# Altium PCB T1_MODIFYV1_0527.PCBDOC (part 2 of 6)
Units mm, origin at the board's own origin, x right, y up, seen from the top; angles counter-clockwise.
Board outline 1320.8 x 844.04 mm, 2 copper layers (Top Layer, Bottom Layer); 219 components, 215 nets, 1393 pads, 492 vias.
Unrouted connection lines stored in the file: 60.
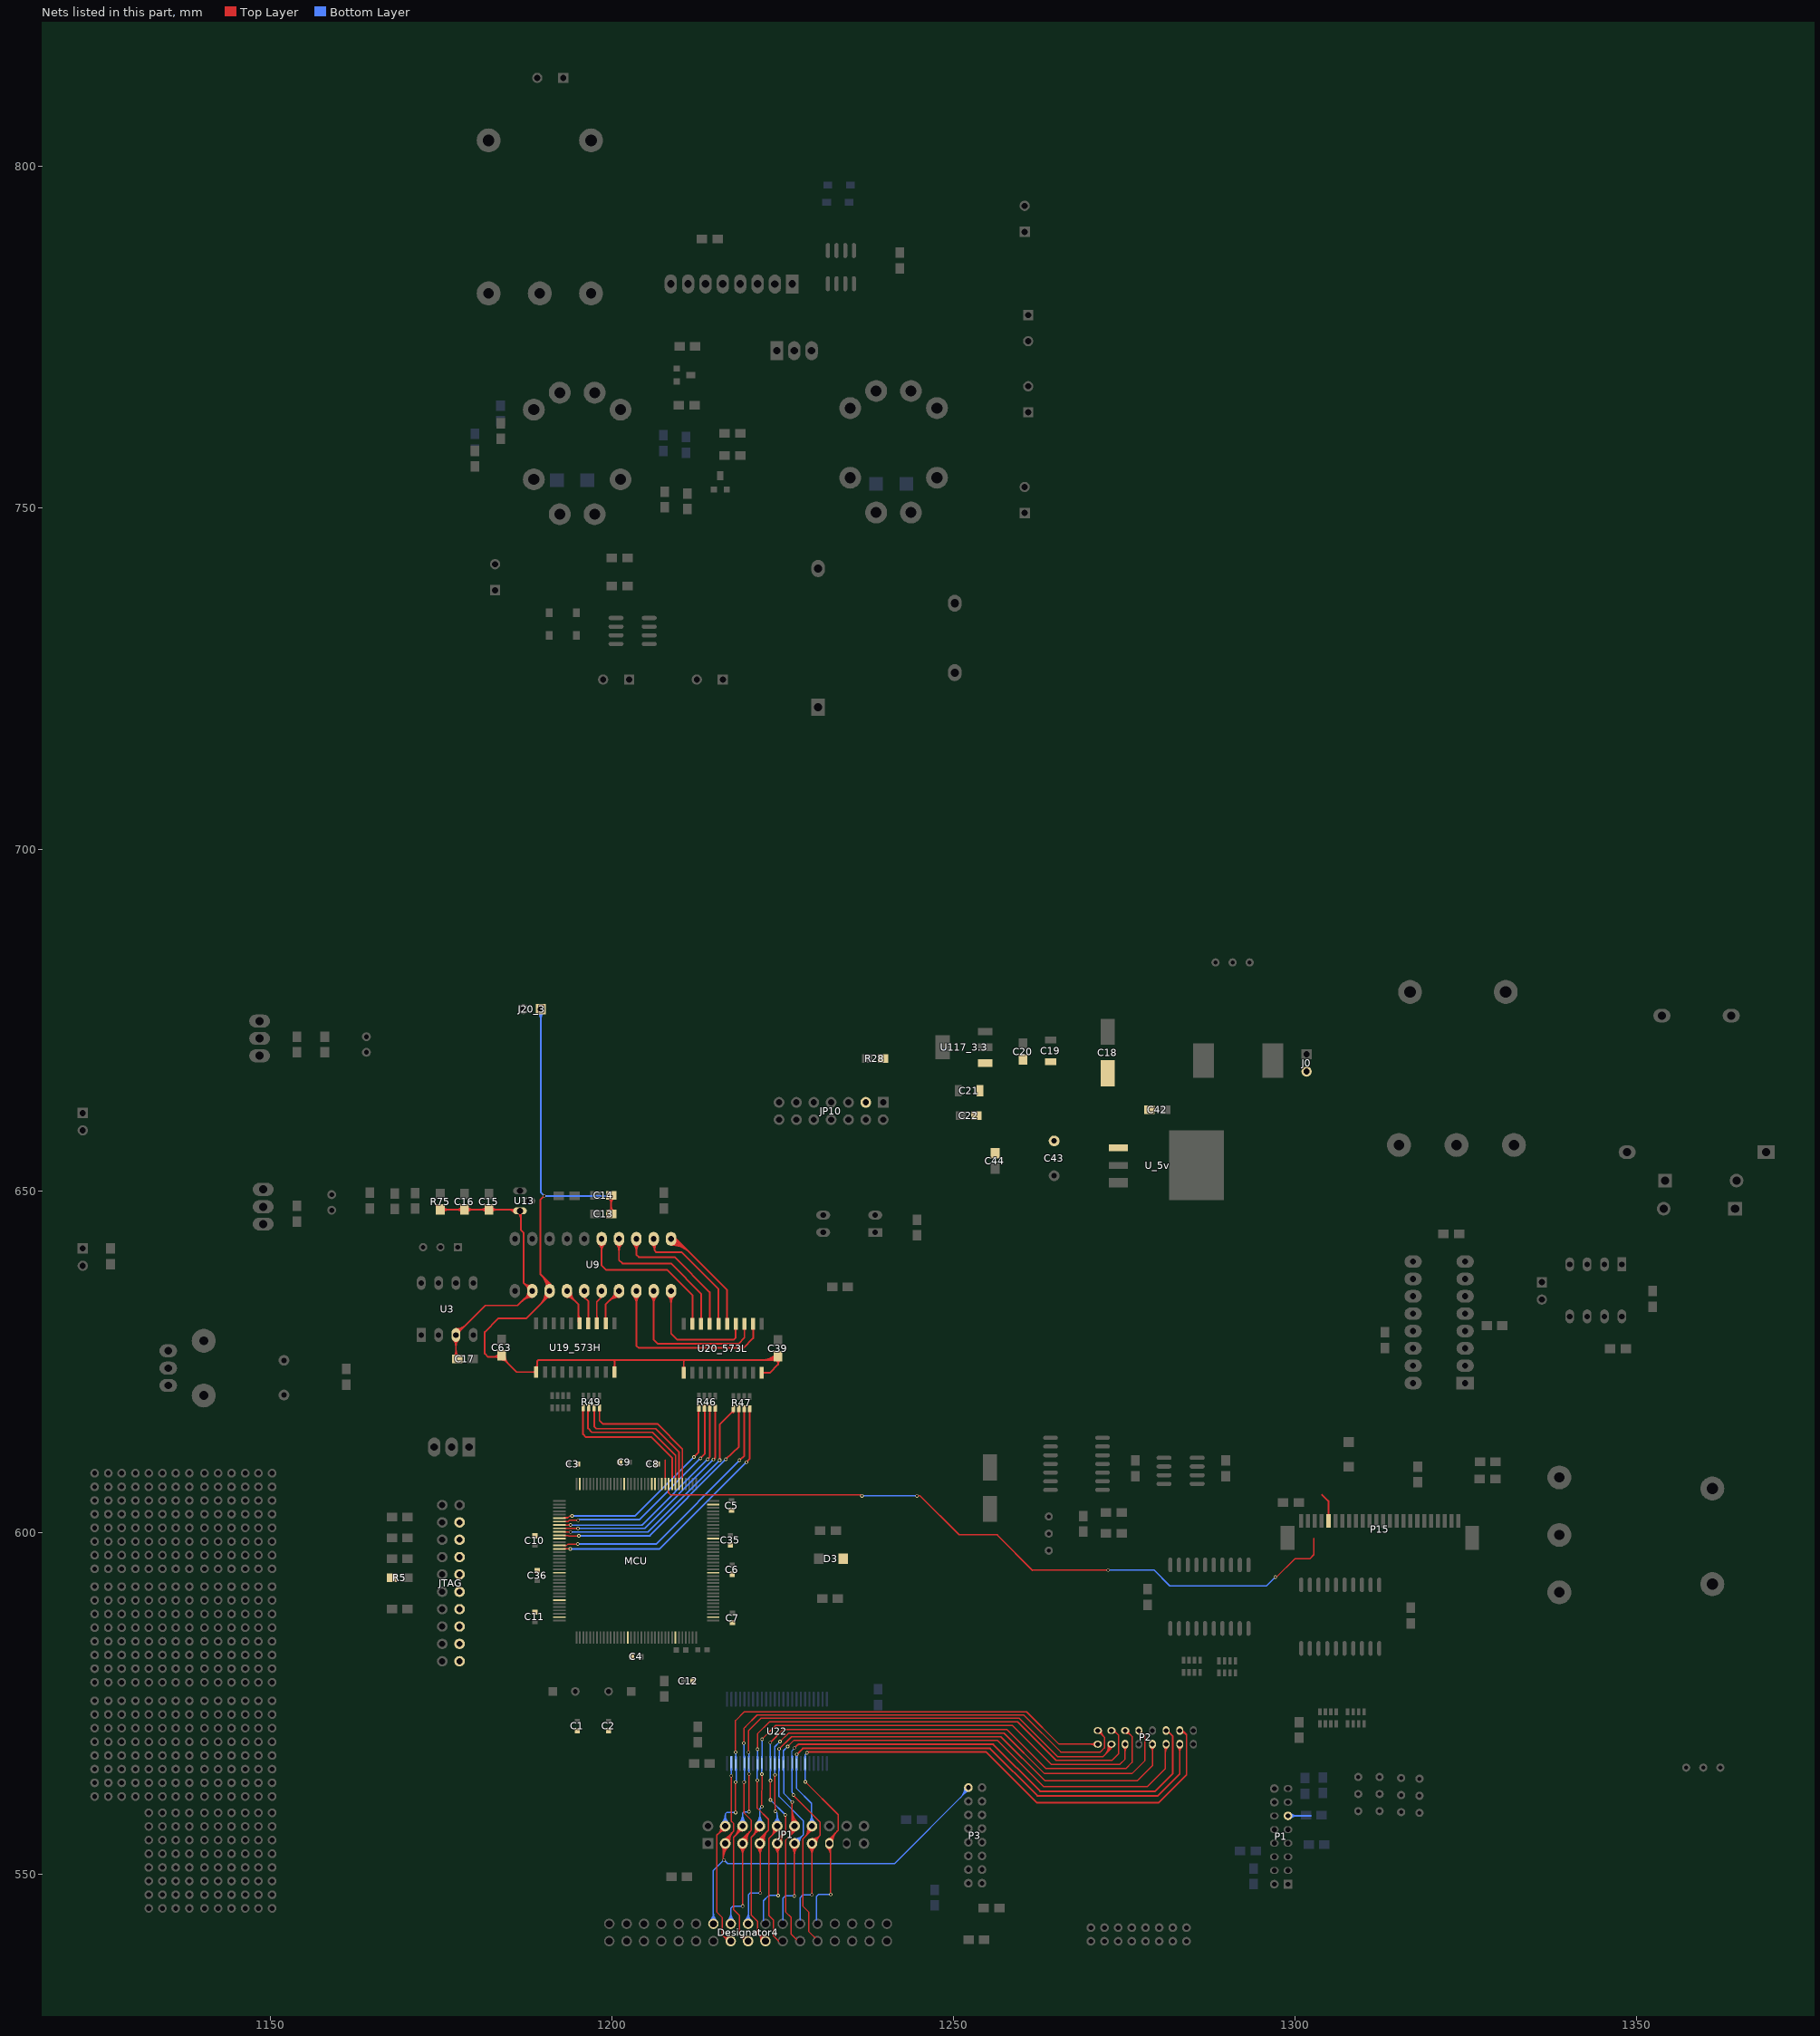
[diagram p2: the nets of this part, all layers, seen from the top]

## Via types
v1: diameter 0.5, hole 0.3, Top Layer to Bottom Layer, 470 vias
v2: diameter 0.8, hole 0.5, Top Layer to Bottom Layer, 12 vias
v3: diameter 3, hole 1.5, Top Layer to Bottom Layer, 4 vias
v4: diameter 3, hole 3, Top Layer to Bottom Layer, 4 vias
v5: diameter 1, hole 0.7, Top Layer to Bottom Layer, 2 vias

## Nets (pads, with @x,y where several pads share a name; then routed paths per layer and width w, separated by ;. In a path a pad name is that pad's centre, name@x,y a point inside that pad or via, vN(x,y) a via of type N, cw(c..) or ccw(c..) an arc to the next point about the centre after c; other vN are vias at no path point) (continued)
AD_D3: JP1.15 P2.19 U22.6 | length 105.7
  Top Layer w0.2: v1(1228.268,563.575) 1233.068,558.775 1233.068,556.489 1231.778,555.198 JP1.15@1231.778,554.552 ; JP1.15@1231.424,554.011 cw(c1230.092,552.678) 1231.976,552.678 ; JP1.15@1231.566,554.152 cw(c1230.574,553.161) 1231.976,553.161 ; JP1.15@1231.678,554.739 cw(c1232.543,554.739) 1231.931,555.352 ; JP1.15@1231.707,554.294 cw(c1231.057,553.644) 1231.976,553.644 ; JP1.15@1231.878,554.739 cw(c1233.226,554.739) 1232.273,555.693 ; v1(1231.976,547.091) JP1.15@1231.976,554.33 ; 1231.976,553.637 cw(c1232.506,553.637) JP1.15@1232.131,554.011 ; JP1.15@1232.078,554.739 cw(c1233.909,554.739) 1232.614,556.034 ; JP1.15@1232.278,554.739 cw(c1234.592,554.739) 1232.956,556.376
  Top Layer w0.254: v1@1228.408,567.703 1228.649,567.944 1254.735,567.944 1262.151,560.527 1280.008,560.527 1284.072,564.591 1284.072,570.484 P2.19@1283.28,571.276 ; P2.19@1283.056,571.076 cw(c1283.188,570.414) 1283.665,570.891 ; P2.19@1283.106,570.826 cw(c1283.299,569.854) 1284.001,570.555
  Bottom Layer w0.2: v1@1228.217,563.626 U22.6@1228.217,565.353 ; U22.6@1228.242,567.08 1228.242,567.563 v1(1228.496,567.817) ; 1229.868,542.569 1229.868,546.76 1230.198,547.091 v1(1231.976,547.091)
AD_D4: JP1.14 P2.20 U22.8 | length 104.9
  Top Layer w0.2: 1228.161,555.467 ccw(c1227.066,556.562) JP1.14@1228.57,556.929 ; 1228.412,555.719 ccw(c1227.47,556.66) JP1.14@1228.764,556.976 ; 1228.664,555.97 ccw(c1227.874,556.759) JP1.14@1228.959,557.024 ; 1228.915,556.221 ccw(c1228.278,556.858) JP1.14@1229.153,557.071 ; 1229,556.306 cw(c1229.238,556.068) JP1.14@1229.238,556.405 ; JP1.14@1229.182,556.87 1229.182,556.489 1227.887,555.193 1227.887,545.389 1228.801,544.474 1228.801,541.639 1230.114,540.326
  Top Layer w0.254: v1(1227.023,567.588) 1227.887,568.452 1255.319,568.452 1262.228,561.543 1279.881,561.543 1283.082,564.745 P2.20@1283.082,569.078 ; P2.20@1282.819,568.679 cw(c1282.182,568.043) 1283.082,568.043 cw(c1283.983,568.043) P2.20@1283.346,568.679
  Bottom Layer w0.2: U22.8@1226.979,565.531 1226.947,562.635 1229.157,560.426 JP1.14@1229.157,556.87 ; JP1.14@1228.752,557.578 ccw(c1227.774,558.556) 1229.157,558.556 ; JP1.14@1228.893,557.437 ccw(c1228.257,558.073) 1229.157,558.073 ; 1229.157,557.96 ccw(c1230.075,557.96) JP1.14@1229.437,557.299 ; 1229.157,558.431 ccw(c1230.53,558.431) JP1.14@1229.576,557.443 ; 1229.157,558.902 ccw(c1230.984,558.902) JP1.14@1229.715,557.587
  Bottom Layer w0.254: U22.8@1226.998,567.055 1226.998,567.563 v1(1227.023,567.588)
AD_D5: JP1.13 P2.21 U22.9 | length 104.4
  Top Layer w0.2: v1@1226.515,561.569 1230.452,557.632 1230.452,555.766 JP1.13@1229.238,554.552 1229.238,547.73 1229.233,547.726 v1(1229.233,547.014) ; JP1.13@1228.752,554.066 cw(c1227.578,552.892) 1229.238,552.892 cw(c1230.897,552.892) JP1.13@1229.724,554.066 ; JP1.13@1228.893,554.207 cw(c1228.061,553.375) 1229.238,553.375 cw(c1230.414,553.375) JP1.13@1229.582,554.207 ; JP1.13@1229.238,555.039 ccw(c1229.238,556.216) 1230.07,555.384 ccw(c1230.902,554.552) JP1.13@1229.725,554.552 ; JP1.13@1229.238,555.239 ccw(c1229.238,556.899) 1230.411,555.725 ccw(c1231.585,554.552) JP1.13@1229.925,554.552
  Top Layer w0.254: v1(1226.642,568.503) 1227.176,569.036 1227.226,569.036 ; 1227.277,569.062 1255.776,569.062 1262.634,562.204 1279.5,562.204 1282.065,564.769 1282.065,570.255 1281.405,570.916 1281.405,571.221 P2.21@1281.074,571.551 ; P2.21@1281.083,570.824 cw(c1281.09,569.844) 1281.783,570.537
  Bottom Layer w0.15: U22.9@1226.312,567.055 1226.312,568.147 v1@1226.769,568.604 ; 1226.312,567.468 ccw(c1226.586,567.468) U22.9@1226.392,567.275
  Bottom Layer w0.2: U22.9@1226.337,565.48 1226.337,562 v1@1226.49,561.848 ; 1227.506,542.798 1227.506,546.608 1227.912,547.014 v1(1229.233,547.014)
  other v1: 1226.515,561.645
AD_D6: JP1.12 P2.22 U22.11 | length 108.8
  Top Layer w0.2: v1(1225.677,568.731) 1226.566,569.62 1256.436,569.62 1263.167,562.889 1278.331,562.889 1280.947,565.506 1280.947,569.112 P2.22@1281.201,569.366 ; 1225.748,555.391 ccw(c1224.783,556.355) JP1.12@1226.056,556.845 ; 1225.965,555.609 ccw(c1225.098,556.476) JP1.12@1226.243,556.917 ; 1226.183,555.826 ccw(c1225.412,556.597) JP1.12@1226.43,556.989 ; JP1.12@1226.215,557.582 ccw(c1225.975,557.825) 1226.317,557.823 ; JP1.12@1226.312,557.098 v1(1226.337,560.629) ; 1226.32,558.237 ccw(c1227.848,558.226) JP1.12@1226.76,557.153 ; 1226.324,558.72 ccw(c1228.335,558.706) JP1.12@1226.902,557.294 ; 1226.327,559.203 ccw(c1228.821,559.185) JP1.12@1227.045,557.434 ; 1226.331,559.686 ccw(c1229.307,559.664) JP1.12@1227.187,557.575 ; 1226.4,556.044 ccw(c1225.726,556.718) JP1.12@1226.616,557.061 ; 1226.618,556.261 ccw(c1226.04,556.839) JP1.12@1226.803,557.132 ; JP1.12@1226.698,557.092 1226.698,556.341 1225.372,555.015 1225.372,544.551 1226.185,543.738 1226.185,541.274 1227.176,540.283 ; P2.22@1280.8,568.66 cw(c1280.443,568.303) 1280.947,568.303 ; 1280.947,567.652 cw(c1282.374,567.652) P2.22@1281.365,568.66 ; 1280.947,568.135 cw(c1281.891,568.135) P2.22@1281.224,568.802
  Bottom Layer w0.2: U22.11@1225.03,565.278 cw(c1224.88,565.127) 1225.093,565.127 ; U22.11@1225.067,566.801 1225.067,568.122 v1(1225.677,568.731) ; U22.11@1225.093,565.531 1225.093,561.924 v1@1226.342,560.633
AD_D7: JP1.11 P2.24 U22.12 | length 100.9
  Top Layer w0.2: v1(1224.432,568.376) 1226.236,570.179 1256.894,570.179 1263.32,563.753 1276.909,563.753 1279.082,565.927 P2.24@1279.082,569.078 ; JP1.11@1226.212,554.066 cw(c1225.172,553.027) 1226.642,553.027 ; JP1.11@1226.353,554.207 cw(c1225.655,553.509) 1226.642,553.509 ; v1@1226.642,546.76 JP1.11@1226.642,554.33 ; 1226.642,552.758 cw(c1228.491,552.758) JP1.11@1227.184,554.066 ; 1226.642,553.241 cw(c1228.009,553.241) JP1.11@1227.042,554.207 ; 1226.642,553.724 cw(c1227.526,553.724) JP1.11@1226.901,554.349 ; P2.24@1278.8,568.66 cw(c1278.117,567.978) 1279.082,567.978 cw(c1280.048,567.978) P2.24@1279.365,568.66
  Bottom Layer w0.2: 1224.407,565.127 cw(c1224.62,565.127) U22.12@1224.469,565.278 ; U22.12@1224.407,565.531 1224.407,561.442 1227.963,557.886 1227.963,555.817 JP1.11@1226.698,554.552 ; U22.12@1224.432,567.004 v1@1224.432,568.477 ; 1224.966,542.798 1224.966,546.506 1225.321,546.862 v1(1226.642,546.862) ; JP1.11@1226.698,555.039 ccw(c1226.698,556.216) 1227.53,555.384 ccw(c1228.362,554.552) JP1.11@1227.185,554.552 ; JP1.11@1226.698,555.239 ccw(c1226.698,556.899) 1227.871,555.725 ccw(c1229.045,554.552) JP1.11@1227.385,554.552
AD_D8: JP1.10 P2.25 U22.13 | length 101.7
  Top Layer w0.2: 1223.246,555.607 ccw(c1222.416,556.437) JP1.10@1223.514,556.85 ; 1223.465,555.826 ccw(c1222.735,556.557) JP1.10@1223.702,556.92 ; 1223.685,556.046 ccw(c1223.054,556.677) JP1.10@1223.889,556.991 ; v1(1223.823,564.591) 1223.823,561.137 v1(1223.848,559.257) ; 1223.904,556.265 ccw(c1223.372,556.797) JP1.10@1224.076,557.061 ; 1223.963,556.324 cw(c1224.158,556.129) JP1.10@1224.158,556.405 ; JP1.10@1224.026,556.87 1224.026,556.387 1222.959,555.32 1222.959,543.966 1223.594,543.331 1223.594,541.02 1224.686,539.928 ; v1(1224.559,569.468) 1225.804,570.713 1257.351,570.713 1263.294,564.769 1276.096,564.769 1277.95,566.623 1277.95,570.306 1277.178,571.078 P2.25@1277.082,571.078 ; P2.25@1277.091,570.778 cw(c1277.126,569.931) 1277.726,570.531 ; P2.25@1277.482,570.978 ccw(c1277.975,570.978) 1277.627,570.63
  Bottom Layer w0.2: JP1.10@1223.672,557.578 ccw(c1222.51,558.74) 1224.153,558.74 ; v1@1223.797,564.617 U22.13@1223.797,565.302 ; U22.13@1223.797,567.08 1223.797,568.706 v1(1224.559,569.468) ; JP1.10@1223.813,557.437 ccw(c1222.993,558.257) 1224.153,558.257 ; v1(1223.848,559.257) 1224.153,558.952 JP1.10@1224.153,556.692 ; 1224.153,558.28 ccw(c1225.346,558.28) JP1.10@1224.502,557.437 ; 1224.153,558.763 ccw(c1225.829,558.763) JP1.10@1224.644,557.578
AD_D9: JP1.9 P2.27 U22.14 | length 102.3
  Top Layer w0.2: v1(1223.137,569.316) 1225.067,571.246 1257.757,571.246 1263.472,565.531 1275.207,565.531 1276.096,566.42 1276.096,570.205 P2.27@1275.222,571.078 ; v1@1223.162,560.984 v1(1223.162,563.753) ; JP1.9@1223.672,554.066 cw(c1222.203,552.597) 1224.28,552.597 ; JP1.9@1223.813,554.207 cw(c1222.686,553.08) 1224.28,553.08 ; JP1.9@1223.955,554.349 cw(c1223.169,553.563) 1224.28,553.563 ; JP1.9@1224.158,555.239 ccw(c1224.158,555.523) 1224.359,555.323 ; JP1.9@1224.215,554.609 1224.215,555.179 1225.372,556.336 ; JP1.9@1224.244,554.566 cw(c1225.314,554.744) 1224.547,555.511 ; v1(1224.28,546.938) JP1.9@1224.28,554.33 ; 1224.28,553.188 cw(c1225.522,553.188) JP1.9@1224.644,554.066 ; 1224.28,553.67 cw(c1225.039,553.67) JP1.9@1224.502,554.207 ; JP1.9@1224.441,554.599 cw(c1225.786,554.822) 1224.822,555.786 ; JP1.9@1224.639,554.632 cw(c1226.258,554.901) 1225.097,556.061 ; JP1.9@1224.836,554.665 cw(c1226.729,554.979) 1225.372,556.336 ; v1@1225.372,558.724 1225.372,556.336 ; P2.27@1275.182,570.678 cw(c1275.182,569.616) 1275.934,570.367 ; P2.27@1275.182,570.878 cw(c1275.182,570.299) 1275.592,570.709 ; P2.27@1275.582,571.078 ccw(c1276.451,571.078) 1275.837,570.464
  Bottom Layer w0.2: 1222.146,542.849 1222.146,546.176 1222.908,546.938 v1(1224.28,546.938) ; v1(1223.162,560.934) 1225.321,558.775 v1(1225.321,558.724) ; v1(1223.162,563.753) U22.14@1223.162,565.379 ; U22.14@1223.162,567.106 v1@1223.162,569.366
AD_D10: Designator4.d10 JP1.8 P2.28 U22.16 | length 102.7
  Top Layer w0.2: 1220.528,555.632 ccw(c1219.468,556.692) JP1.8@1220.942,556.966 ; 1220.797,555.901 ccw(c1219.921,556.777) JP1.8@1221.139,557.003 ; 1221.065,556.17 ccw(c1220.374,556.861) JP1.8@1221.335,557.039 ; 1221.076,556.18 cw(c1221.618,555.638) JP1.8@1221.618,556.405 ; JP1.8@1221.486,556.844 1221.486,556.59 1220.343,555.447 1220.343,544.093 1221.283,543.154 1221.283,541.401 Designator4.d10@1222.426,540.258 ; Designator4.d10@1221.764,540.258 ccw(c1220.166,540.258) 1221.296,541.388 ccw(c1222.426,542.518) Designator4.d10@1222.426,540.92 ; v1@1221.892,560.001 v1(1221.918,564.693) ; v1@1221.918,569.824 1223.924,571.83 1258.57,571.83 1264.285,566.115 1274.293,566.115 1275.082,566.905 P2.28@1275.082,569.078 ; Designator4.d10@1221.964,540.258 ccw(c1220.848,540.258) 1221.637,541.047 ccw(c1222.426,541.835) Designator4.d10@1222.426,540.72 ; P2.28@1274.8,568.66 cw(c1274.117,567.978) 1275.082,567.978 cw(c1276.048,567.978) P2.28@1275.365,568.66
  Bottom Layer w0.2: JP1.8@1221.132,557.578 ccw(c1219.958,558.752) 1221.618,558.752 ccw(c1223.277,558.752) JP1.8@1222.104,557.578 ; JP1.8@1221.273,557.437 ccw(c1220.441,558.269) 1221.618,558.269 ccw(c1222.794,558.269) JP1.8@1221.962,557.437 ; JP1.8@1221.618,557.092 1221.618,559.668 v1(1221.918,559.968) ; v1@1221.867,564.876 ccw(c1222.101,564.876) v1@1221.935,564.71 ; 1221.867,565.127 cw(c1222.08,565.127) U22.16@1221.929,565.278 ; U22.16@1221.867,565.429 1221.867,564.744 v1(1221.918,564.693) ; U22.16@1221.918,567.106 1221.918,569.773 v1(1221.943,569.798)
AD_D11: Designator4.d11 JP1.7 P2.29 U22.17 | length 107.3
  Top Layer w0.2: JP1.7@1221.132,554.066 cw(c1219.847,552.781) 1221.664,552.781 ; v1(1221.232,563.804) 1221.232,559.714 1222.858,558.089 1222.858,556.514 ; v1@1221.257,568.376 1221.257,570.586 1223.035,572.364 1259.332,572.364 1264.971,566.725 1273.175,566.725 1274.14,567.69 1274.14,570.408 P2.29@1273.302,571.246 ; JP1.7@1221.273,554.207 cw(c1220.33,553.264) 1221.664,553.264 ; JP1.7@1221.415,554.349 cw(c1220.813,553.747) 1221.664,553.747 ; JP1.7@1221.507,554.531 cw(c1222.511,554.722) 1221.789,555.445 ; JP1.7@1221.618,554.552 1221.618,555.274 1222.858,556.514 ; v1(1221.664,547.294) JP1.7@1221.664,554.253 ; 1221.664,553.004 cw(c1223.166,553.004) JP1.7@1222.104,554.066 ; 1221.664,553.486 cw(c1222.683,553.486) JP1.7@1221.962,554.207 ; JP1.7@1221.704,554.568 cw(c1222.96,554.808) 1222.056,555.712 ; JP1.7@1221.9,554.606 cw(c1223.41,554.893) 1222.323,555.979 ; JP1.7@1222.097,554.643 cw(c1223.859,554.978) 1222.59,556.247 ; JP1.7@1222.293,554.681 cw(c1224.308,555.064) 1222.858,556.514 ; P2.29@1273.193,570.878 cw(c1273.246,569.862) 1273.966,570.582 ; P2.29@1273.582,571.078 ccw(c1273.854,571.078) 1273.662,570.886
  Bottom Layer w0.2: Designator4.d11@1219.418,543.266 ccw(c1218.165,544.519) 1219.937,544.519 ; Designator4.d11@1219.559,543.125 ccw(c1218.648,544.036) 1219.937,544.036 ; Designator4.d11@1219.937,542.569 1219.937,547.065 1220.165,547.294 v1(1221.664,547.294) ; 1219.937,543.791 ccw(c1220.879,543.791) Designator4.d11@1220.212,543.125 ; 1219.937,544.274 ccw(c1221.361,544.274) Designator4.d11@1220.354,543.266 ; v1(1221.232,563.804) U22.17@1221.232,565.379 ; 1221.232,565.127 cw(c1221.445,565.127) U22.17@1221.294,565.278 ; U22.17@1221.257,566.928 1221.257,568.325 v1(1221.283,568.35)
AD_D12: Designator4.d12 JP1.6 P2.30 U22.19 | length 105.8
  Top Layer w0.2: 1217.912,555.607 ccw(c1216.715,556.804) JP1.6@1218.395,557.009 ; 1218.202,555.897 ccw(c1217.232,556.867) JP1.6@1218.594,557.033 ; 1218.449,556.144 cw(c1219.078,555.516) JP1.6@1219.078,556.405 ; 1218.493,556.188 ccw(c1217.75,556.93) JP1.6@1218.792,557.057 ; 1218.743,541.147 ccw(c1219.44,541.844) Designator4.d12@1219.706,540.895 ; 1218.935,540.954 cw(c1218.239,540.258) Designator4.d12@1219.224,540.258 ; 1218.984,540.906 ccw(c1219.546,541.467) Designator4.d12@1219.761,540.703 ; JP1.6@1219.078,557.092 1219.078,556.773 1217.752,555.447 1217.752,544.855 1218.616,543.992 1218.616,541.274 1219.632,540.258 Designator4.d12@1219.886,540.258 ; 1219.226,540.664 ccw(c1219.652,541.09) Designator4.d12@1219.815,540.51 ; v1(1219.962,567.919) 1219.962,571.068 1221.791,572.897 1259.561,572.897 1265.199,567.258 1271.829,567.258 1273.082,568.512 P2.30@1273.082,569.078 ; v1(1220.013,559.181) v1(1220.013,564.718) ; 1272.162,567.591 ccw(c1271.057,568.697) P2.30@1272.59,569 ; 1272.427,567.856 ccw(c1271.499,568.784) P2.30@1272.786,569.039 ; 1272.692,568.121 ccw(c1271.941,568.872) P2.30@1272.982,569.078 ; 1272.956,568.386 ccw(c1272.383,568.959) P2.30@1273.179,569.117
  Bottom Layer w0.2: JP1.6@1218.592,557.578 ccw(c1217.418,558.752) 1219.078,558.752 ccw(c1220.737,558.752) JP1.6@1219.564,557.578 ; JP1.6@1218.733,557.437 ccw(c1217.901,558.269) 1219.078,558.269 ccw(c1220.254,558.269) JP1.6@1219.422,557.437 ; JP1.6@1219.078,557.092 1219.078,558.983 1219.276,559.181 v1(1220.013,559.181) ; U22.19@1219.95,565.278 cw(c1219.8,565.127) 1220.013,565.127 ; U22.19@1219.987,567.157 v1@1219.987,567.919 ; v1(1220.013,564.718) U22.19@1220.013,565.404
AD_D13: Designator4.d13 JP1.5 P2.31 U22.20 | length 107.2
  Top Layer w0.2: JP1.5@1218.592,554.066 cw(c1217.418,552.892) 1219.078,552.892 cw(c1220.737,552.892) JP1.5@1219.564,554.066 ; JP1.5@1218.733,554.207 cw(c1217.901,553.375) 1219.078,553.375 cw(c1220.254,553.375) JP1.5@1219.422,554.207 ; JP1.5@1218.967,554.534 cw(c1219.99,554.696) 1219.257,555.428 ; v1(1219.078,545.384) 1219.078,555.249 1220.368,556.539 ; JP1.5@1219.164,554.566 cw(c1220.47,554.772) 1219.535,555.706 ; v1(1219.264,569.256) 1219.264,571.386 1219.519,571.642 ; v1(1219.302,563.55) 1219.302,559.003 1220.368,557.936 1220.368,556.539 ; JP1.5@1219.362,554.597 cw(c1220.949,554.847) 1219.813,555.984 ; 1219.519,571.667 1221.207,573.354 1260.246,573.354 1265.657,567.944 1271.473,567.944 1272.057,568.528 1272.057,570.103 P2.31@1271.082,571.078 ; JP1.5@1219.559,554.628 cw(c1221.429,554.923) 1220.091,556.262 ; JP1.5@1219.757,554.659 cw(c1221.909,554.999) 1220.368,556.539 ; P2.31@1271.182,570.678 cw(c1271.182,569.954) 1271.695,570.466 ; P2.31@1271.382,571.078 ccw(c1272.107,571.078) 1271.595,570.566 ; P2.31@1271.582,571.078 ccw(c1272.789,571.078) 1271.936,570.225
  Bottom Layer w0.2: Designator4.d13@1216.878,543.266 ccw(c1215.748,544.396) 1217.346,544.396 ccw(c1218.944,544.396) Designator4.d13@1217.814,543.266 ; Designator4.d13@1217.019,543.125 ccw(c1216.23,543.913) 1217.346,543.913 ccw(c1218.461,543.913) Designator4.d13@1217.672,543.125 ; Designator4.d13@1217.346,542.798 1217.346,545.033 1217.697,545.384 v1(1219.078,545.384) ; v1(1219.264,569.256) 1219.302,567.919 U22.20@1219.302,567.106 ; 1219.302,567.469 ccw(c1219.602,567.469) U22.20@1219.389,567.257 ; v1@1219.352,563.55 U22.20@1219.352,565.531
AD_D14: Designator4.d14 JP1.4 P2.32 U22.22 | length 102.3
  Top Layer w0.2: 1215.537,555.95 ccw(c1214.714,556.773) JP1.4@1215.861,556.974 ; 1215.606,556.019 cw(c1216.538,555.086) JP1.4@1216.538,556.405 ; 1215.809,556.222 ccw(c1215.177,556.854) JP1.4@1216.058,557.008 ; 1215.947,556.36 cw(c1216.538,555.769) JP1.4@1216.538,556.605 ; 1216.254,540.995 ccw(c1216.756,541.497) Designator4.d14@1217.061,540.856 ; 1216.454,540.794 ccw(c1216.885,541.225) Designator4.d14@1217.147,540.675 ; 1216.467,540.781 cw(c1215.944,540.258) Designator4.d14@1216.684,540.258 ; JP1.4@1216.538,557.092 1216.538,556.951 1215.466,555.879 1215.39,555.879 1215.339,555.828 1215.339,544.474 1216.076,543.738 1216.076,541.172 Designator4.d14@1217.295,539.953 ; 1216.654,540.594 ccw(c1217.014,540.954) Designator4.d14@1217.233,540.495 ; v1(1218.057,559.079) v1(1218.057,563.55) ; v1(1218.057,567.919) 1218.057,572.541 1219.327,573.811 1260.678,573.811 1265.399,569.091 ; 1265.386,569.078 P2.32@1271.082,569.078 ; P2.32@1270.7,568.795 ccw(c1270.017,568.113) 1270.017,569.078 ccw(c1270.017,570.044) P2.32@1270.7,569.361
  Bottom Layer w0.2: JP1.4@1216.052,557.578 ccw(c1214.878,558.752) 1216.538,558.752 ccw(c1218.197,558.752) JP1.4@1217.024,557.578 ; JP1.4@1216.193,557.437 ccw(c1215.361,558.269) 1216.538,558.269 ccw(c1217.714,558.269) JP1.4@1216.882,557.437 ; JP1.4@1216.538,557.092 1216.538,558.881 1216.736,559.079 v1(1218.057,559.079) ; v1@1218.039,567.901 cw(c1217.874,567.736) v1@1218.108,567.736 ; U22.22@1218.045,567.257 ccw(c1217.895,567.408) 1218.108,567.408 ; v1(1218.057,563.55) 1218.159,563.651 U22.22@1218.159,565.48 ; v1(1218.057,567.919) 1218.108,567.868 U22.22@1218.108,566.928
AD_D15: Designator4.d15 JP1.3 P3.33 U22.23 | length 86.1
  Top Layer w0.2: JP1.3@1216.052,554.066 cw(c1215.626,553.64) 1216.228,553.64 ; v1@1216.228,552.277 cw(c1218.636,552.277) JP1.3@1217.004,554.047 ; 1216.228,552.573 ccw(c1216.809,552.573) v1@1216.398,552.163 ; 1216.228,552.733 cw(c1218.215,552.733) JP1.3@1216.868,554.194 ; 1216.228,553.189 cw(c1217.794,553.189) JP1.3@1216.733,554.341 ; 1216.228,553.646 cw(c1217.373,553.646) JP1.3@1216.597,554.488 ; JP1.3@1216.228,554.838 1216.228,552.298 v1(1216.381,552.145) ; JP1.3@1216.24,554.85 1217.778,556.387 ; JP1.3@1216.624,554.566 cw(c1217.755,554.745) 1216.945,555.555 ; JP1.3@1216.822,554.597 cw(c1218.234,554.821) 1217.223,555.832 ; JP1.3@1217.019,554.628 cw(c1218.712,554.897) 1217.5,556.109 ; JP1.3@1217.217,554.66 cw(c1219.191,554.973) 1217.778,556.387 ; v1(1217.422,564.464) 1217.422,557.814 1217.778,557.458 1217.778,556.387
  Bottom Layer w0.2: Designator4.d15@1214.338,543.266 ccw(c1213.208,544.396) 1214.806,544.396 ccw(c1216.404,544.396) Designator4.d15@1215.274,543.266 ; Designator4.d15@1214.479,543.125 ccw(c1213.69,543.913) 1214.806,543.913 ccw(c1215.921,543.913) Designator4.d15@1215.132,543.125 ; Designator4.d15@1214.806,542.798 1214.806,550.596 1216.342,552.132 1216.368,552.132 1216.889,551.612 1241.323,551.612 1251.89,562.178 P3.33@1251.89,562.889 ; v1(1217.422,564.464) 1217.447,564.49 U22.23@1217.447,565.556 ; 1251.005,561.293 ccw(c1249.569,562.729) P3.33@1251.599,562.729 ; 1251.346,561.635 ccw(c1250.252,562.729) P3.33@1251.799,562.729 ; 1251.688,561.976 ccw(c1250.935,562.729) P3.33@1251.999,562.729 ; 1251.743,562.032 cw(c1252.134,561.641) P3.33@1252.134,562.194
ADDR4_1: P15.5 | length 4.1
  Top Layer w0.254: 1303.909,605.612 1304.849,604.672 P15.5@1304.849,601.904
ADRST: P1.11 | length 5.3
  Bottom Layer w0.254: P1.11@1298.931,558.589 1302.258,558.589 ; P1.11@1299.29,558.23 cw(c1300.157,557.363) 1300.157,558.589 cw(c1300.157,559.816) P1.11@1299.29,558.948
AGND: C15.2 C16.2 C17.1 R75.2 U3.3 U9.2 U13.3 | length 69.5
  Top Layer w0.254: R75.2@1174.826,647.344 1186.285,647.344 U13.3@1186.485,647.144 ; R75.2@1175.185,646.985 cw(c1176.053,646.118) 1176.053,647.344 cw(c1176.053,648.571) R75.2@1175.185,647.704 ; U3.3@1176.753,628.24 cw(c1175.886,627.373) 1177.112,627.373 cw(c1178.339,627.373) U3.3@1177.471,628.24 ; C17.1@1176.804,625.809 ccw(c1176.059,626.553) 1177.112,626.553 ; 1177.112,626.185 ccw(c1177.899,626.185) C17.1@1177.343,625.629 ; 1177.112,626.799 ccw(c1178.512,626.799) C17.1@1177.522,625.809 ; U3.3@1177.112,629.361 ccw(c1177.112,630.281) 1177.763,629.631 ; U3.3@1177.112,629.615 ccw(c1177.112,631.148) 1178.196,630.064 ; U3.3@1177.112,629.869 ccw(c1177.112,632.015) 1178.63,630.498 ; C17.1@1177.29,625.45 1177.112,625.627 U3.3@1177.112,628.98 1181.43,633.298 1186.155,633.298 U9.2@1188.288,635.432 ; U3.3@1177.62,629.361 cw(c1177.927,629.361) 1177.71,629.578 ; C16.2@1178.023,646.985 ccw(c1177.156,646.118) 1177.156,647.344 ccw(c1177.156,648.571) C16.2@1178.023,647.704 ; C16.2@1178.741,646.985 cw(c1179.609,646.118) 1179.609,647.344 cw(c1179.609,648.571) C16.2@1178.741,647.704 ; C15.2@1181.579,646.985 ccw(c1180.712,646.118) 1180.712,647.344 ccw(c1180.712,648.571) C15.2@1181.579,647.704 ; C15.2@1182.297,646.985 cw(c1183.165,646.118) 1183.165,647.344 cw(c1183.165,648.571) C15.2@1182.297,647.704 ; 1184.601,647.344 cw(c1184.601,645.761) U13.3@1185.721,646.881 ; 1185.215,647.344 cw(c1185.215,646.374) U13.3@1185.901,647.06 ; U13.3@1186.221,646.881 cw(c1185.278,645.937) 1186.612,645.937 ; U13.3@1186.401,647.06 cw(c1185.891,646.55) 1186.612,646.55 cw(c1187.079,646.551) U13.3@1186.749,646.881 ; U13.3@1186.612,646.963 1186.612,644.373 1187.018,643.966 1187.018,636.626 U9.2@1188.415,635.229 ; 1186.771,633.914 cw(c1188.288,632.397) U9.2@1188.288,634.543 ; 1187.183,636.46 ccw(c1187.76,637.038) U9.2@1188.057,636.277 ; 1187.204,634.348 cw(c1188.288,633.264) U9.2@1188.288,634.797 ; 1187.384,634.527 ccw(c1186.733,635.178) U9.2@1187.653,635.178 ; 1187.438,636.206 cw(c1186.917,635.686) U9.2@1187.653,635.686 ; 1187.458,636.186 ccw(c1187.915,636.642) U9.2@1188.15,636.041
D0: MCU.114 R46.1 | length 30.4
  Top Layer w0.2: MCU.114@1192.886,602.234 1193.521,602.234 1193.775,602.488 v1(1194.13,602.488)
  Top Layer w0.254: v1(1211.961,611.124) 1212.647,611.81 R46.1@1212.647,618.134 ; 1212.647,617.653 cw(c1213.03,617.653) R46.1@1212.759,617.924
  Bottom Layer w0.254: v1(1194.13,602.488) 1203.325,602.488 v1(1211.961,611.124)
D1: MCU.115 R46.2 | length 31.4
  Top Layer w0.2: MCU.115@1192.911,601.65 1192.916,601.655 1193.5,601.655 1193.724,601.878 v1(1195.019,601.878)
  Top Layer w0.254: v1(1212.913,610.933) 1213.536,611.556 R46.2@1213.536,618.058 ; R46.2@1213.385,617.924 cw(c1213.022,617.561) 1213.536,617.561
  Bottom Layer w0.254: v1@1195.121,601.98 1203.858,601.98 ; 1203.947,601.967 v1(1212.913,610.933)
D2: MCU.116 R46.3 | length 33
  Top Layer w0.2: MCU.116@1193.063,601.142 1193.546,601.142 1193.571,601.167
  Top Layer w0.254: 1193.571,601.167 v1(1193.876,601.167) ; v1(1213.968,610.794) 1214.272,611.098 R46.3@1214.272,618.261 ; R46.3@1214.185,617.924 cw(c1213.975,617.714) 1214.272,617.714 cw(c1214.569,617.714) R46.3@1214.359,617.924
  Bottom Layer w0.2: v1(1193.876,601.167) 1204.341,601.167
  Bottom Layer w0.254: 1204.341,601.167 v1(1213.968,610.794)
D3: MCU.117 R46.4 | length 34.1
  Top Layer w0.2: MCU.117@1192.962,600.659 v1@1195.019,600.659
  Top Layer w0.254: v1(1214.806,610.743) 1215.072,611.009 R46.4@1215.072,618.261 ; R46.4@1214.985,617.924 cw(c1214.775,617.714) 1215.072,617.714 cw(c1215.369,617.714) R46.4@1215.159,617.924
  Bottom Layer w0.2: v1(1194.994,600.674) 1204.736,600.674
  Bottom Layer w0.254: 1204.736,600.674 v1(1214.806,610.743)
D4: MCU.118 R47.1 | length 36
  Top Layer w0.2: MCU.118@1192.886,600.177 v1@1193.876,600.177
  Top Layer w0.254: v1(1215.72,610.641) 1215.72,615.848 1217.727,617.855 R47.1@1217.727,618.185 ; R47.1@1217.64,617.848 cw(c1217.43,617.638) 1217.727,617.638 cw(c1218.024,617.638) R47.1@1217.814,617.848
  Bottom Layer w0.2: v1(1193.902,600.151) 1205.255,600.177
  Bottom Layer w0.254: 1205.255,600.177 v1(1215.72,610.641)
D5: MCU.119 R47.2 | length 37.1
  Top Layer w0.2: MCU.119@1192.886,599.643 1193.519,599.643 1193.593,599.569 v1(1195.099,599.569)
  Top Layer w0.254: v1(1216.635,610.794) 1218.527,612.61 R47.2@1218.527,618.185 ; R47.2@1218.44,617.848 cw(c1218.23,617.638) 1218.527,617.638 cw(c1218.824,617.638) R47.2@1218.614,617.848
  Bottom Layer w0.254: v1(1195.099,599.569) 1205.522,599.605 v1(1216.635,610.794)
D6: MCU.122 R47.3 | length 39.3
  Top Layer w0.2: MCU.122@1192.809,598.17 1193.317,598.17 1193.521,598.373 v1(1194.943,598.373)
  Top Layer w0.254: v1(1218.62,610.652) 1219.327,611.276 R47.3@1219.327,618.185 ; R47.3@1219.24,617.848 cw(c1219.03,617.638) 1219.327,617.638 cw(c1219.624,617.638) R47.3@1219.414,617.848
  Bottom Layer w0.254: v1(1194.943,598.373) 1206.461,598.412 v1(1218.62,610.652)
D7: MCU.123 R47.4 | length 40.5
  Top Layer w0.2: MCU.123@1192.86,597.662 v1(1193.851,597.662)
  Top Layer w0.254: v1(1219.636,610.366) 1220.127,610.857 R47.4@1220.127,618.185 ; R47.4@1220.04,617.848 cw(c1219.83,617.638) 1220.127,617.638 cw(c1220.424,617.638) R47.4@1220.214,617.848
  Bottom Layer w0.254: v1(1193.851,597.662) 1206.932,597.662 v1(1219.636,610.366)
D8: MCU.77 R49.4 | length 21.3
  Top Layer w0.254: R49.4@1198.043,617.95 cw(c1197.833,617.74) 1198.13,617.74 cw(c1198.427,617.74) R49.4@1198.217,617.95 ; R49.4@1198.13,618.287 1198.13,616.471 1198.626,615.975 1206.602,615.975 1210.265,612.312 MCU.77@1210.265,607.174
D9: MCU.78 R49.3 | length 20.6
  Top Layer w0.254: R49.3@1197.243,617.95 cw(c1196.972,617.678) 1197.356,617.678 ; R49.3@1197.356,618.007 1197.356,615.569 1197.661,615.264 1206.322,615.264 1209.781,611.806 1209.781,608.314 1209.751,608.284 MCU.78@1209.751,607.949
D10: MCU.79 R49.2 | length 21.9
  Top Layer w0.254: 1196.442,617.525 cw(c1197.042,617.525) R49.2@1196.617,617.95 ; R49.2@1196.442,618.058 1196.442,615.315 1197.026,614.731 1205.89,614.731 1209.269,611.353 1209.269,608.459 1209.273,608.455 1209.273,607.639 1209.265,607.631 MCU.79@1209.265,607.174
D11: MCU.80 R49.1 | length 22.1
  Top Layer w0.254: R49.1@1195.643,617.95 cw(c1195.433,617.74) 1195.73,617.74 cw(c1196.027,617.74) R49.1@1195.817,617.95 ; R49.1@1195.73,618.287 1195.73,614.451 1196.162,614.02 1205.738,614.02 1208.761,610.997 MCU.80@1208.761,607.695
D12: MCU.81 | length 105
  Top Layer w0.2: MCU.81@1208.202,606.501 1208.202,605.92 1208.509,605.612 1236.37,605.612 v1(1236.548,605.434) ; v1(1244.625,605.434) 1245.083,605.434 1250.772,599.745 1256.436,599.745 ; 1256.386,599.669 1261.542,594.512 ; 1261.593,594.589 v1(1272.616,594.589) ; v1(1297.076,593.547) 1297.254,593.547 1299.921,596.214 1302.106,596.214 1302.715,596.824 1302.715,599.186
  Bottom Layer w0.2: v1(1236.548,605.434) v1(1244.625,605.434) ; v1(1272.616,594.589) 1279.296,594.589 1281.633,592.252 1295.781,592.252 v1(1297.076,593.547)
D13: MCU.82 | length 2.8
  Top Layer w0.2: MCU.82@1207.77,607.924 1207.77,610.692
D14: MCU.85
D15: MCU.86
DB0: U9.15 U20_573L.19 | length 27.7
  Top Layer w0.254: U9.15@1197.999,642.349 cw(c1196.915,641.265) 1198.448,641.265 cw(c1199.981,641.265) U9.15@1198.897,642.349 ; U9.15@1198.179,642.528 cw(c1197.528,641.878) 1198.448,641.878 cw(c1199.368,641.878) U9.15@1198.718,642.528 ; U9.15@1198.448,643.052 1198.448,639.166 1199.083,638.531 1207.999,638.531 1211.732,634.797 U20_573L.19@1211.732,630.599 ; U20_573L.19@1211.61,631.272 ccw(c1211.315,631.567) 1211.732,631.567 ccw(c1212.15,631.567) U20_573L.19@1211.855,631.272
DB1: U9.14 U20_573L.18 | length 26.1
  Top Layer w0.254: U9.14@1200.539,642.349 cw(c1199.455,641.265) 1200.988,641.265 cw(c1202.521,641.265) U9.14@1201.437,642.349 ; U9.14@1200.719,642.528 cw(c1200.068,641.878) 1200.988,641.878 cw(c1201.908,641.878) U9.14@1201.258,642.528 ; U9.14@1200.988,643.052 1200.988,639.953 1201.496,639.445 1208.583,639.445 1213.002,635.025 U20_573L.18@1213.002,630.599 ; U20_573L.18@1212.88,631.272 ccw(c1212.585,631.567) 1213.002,631.567 ccw(c1213.42,631.567) U20_573L.18@1213.125,631.272
DB2: U9.13 U20_573L.17 | length 24.5
  Top Layer w0.254: U9.13@1203.079,642.349 cw(c1201.995,641.265) 1203.528,641.265 cw(c1205.061,641.265) U9.13@1203.977,642.349 ; U9.13@1203.259,642.528 cw(c1202.608,641.878) 1203.528,641.878 cw(c1204.448,641.878) U9.13@1203.798,642.528 ; U9.13@1203.528,643.052 1203.528,640.74 1203.884,640.385 1209.142,640.385 1214.272,635.254 U20_573L.17@1214.272,630.599 ; U20_573L.17@1214.15,631.272 ccw(c1213.855,631.567) 1214.272,631.567 ccw(c1214.69,631.567) U20_573L.17@1214.395,631.272
DB3: U9.12 U20_573L.16 | length 22
  Top Layer w0.254: U9.12@1205.706,642.276 cw(c1205.021,641.292) 1206.221,641.292 ; U9.12@1205.851,642.485 cw(c1205.359,641.777) 1206.221,641.777 ; U9.12@1206.068,643.052 1206.221,642.899 1206.221,641.299 1206.398,641.121 1210.107,641.121 1215.542,635.686 U20_573L.16@1215.542,630.599 ; 1206.221,641.633 cw(c1207.233,641.633) U9.12@1206.517,642.349 ; U20_573L.16@1215.42,631.272 ccw(c1215.125,631.567) 1215.542,631.567 ccw(c1215.96,631.567) U20_573L.16@1215.665,631.272
DB4: U9.11 U20_573L.15 | length 27.5
  Top Layer w0.254: U9.11@1208.608,642.163 cw(c1208.608,638.238) 1211.383,641.013 ; U9.11@1208.608,642.417 cw(c1208.608,639.105) 1210.95,641.447 ; U9.11@1208.608,642.671 cw(c1208.608,639.973) 1210.516,641.881 ; U9.11@1208.608,642.925 cw(c1208.608,640.84) 1210.082,642.314 ; U9.11@1208.608,643.052 1209.345,643.052 1216.812,635.584 U20_573L.15@1216.812,630.599 ; U9.11@1208.608,643.179 cw(c1208.608,641.707) 1209.649,642.748 ; U20_573L.15@1216.69,631.272 ccw(c1216.395,631.567) 1216.812,631.567 ccw(c1217.23,631.567) U20_573L.15@1216.935,631.272
DB5: U9.10 U20_573L.14 | length 22.7
  Top Layer w0.254: U9.10@1208.159,634.729 cw(c1207.075,633.645) 1208.608,633.645 cw(c1210.141,633.645) U9.10@1209.057,634.729 ; U9.10@1208.339,634.908 cw(c1207.688,634.258) 1208.608,634.258 cw(c1209.528,634.258) U9.10@1208.878,634.908 ; U9.10@1208.608,635.432 1208.608,629.209 1209.548,628.269 1217.778,628.269 1218.082,628.574 U20_573L.14@1218.082,630.599 ; U20_573L.14@1217.96,629.927 cw(c1217.665,629.632) 1218.082,629.632 cw(c1218.5,629.632) U20_573L.14@1218.205,629.927
DB6: U9.9 U20_573L.13 | length 27.6
  Top Layer w0.254: U9.9@1205.619,634.729 cw(c1204.535,633.645) 1206.068,633.645 cw(c1207.601,633.645) U9.9@1206.517,634.729 ; U9.9@1205.799,634.908 cw(c1205.148,634.258) 1206.068,634.258 cw(c1206.988,634.258) U9.9@1206.338,634.908 ; U9.9@1206.068,635.432 1206.068,628.294 1206.678,627.685 1218.463,627.685 1219.352,628.574 U20_573L.13@1219.352,630.599 ; U20_573L.13@1219.23,629.927 cw(c1218.935,629.632) 1219.352,629.632 cw(c1219.77,629.632) U20_573L.13@1219.475,629.927
DB7: U9.8 U20_573L.12 | length 32.4
  Top Layer w0.254: U9.8@1203.079,634.729 cw(c1201.995,633.645) 1203.528,633.645 cw(c1205.061,633.645) U9.8@1203.977,634.729 ; U9.8@1203.259,634.908 cw(c1202.608,634.258) 1203.528,634.258 cw(c1204.448,634.258) U9.8@1203.798,634.908 ; U9.8@1203.528,635.432 1203.528,627.431 1203.884,627.075 1219.2,627.075 1220.622,628.498 U20_573L.12@1220.622,630.599 ; U20_573L.12@1220.5,629.927 cw(c1220.205,629.632) 1220.622,629.632 cw(c1221.04,629.632) U20_573L.12@1220.745,629.927
DB8: U9.7 U19_573H.12 | length 9.8
  Top Layer w0.254: U19_573H.12@1198.91,631.373 ccw(c1198.615,631.669) 1199.032,631.669 ccw(c1199.45,631.669) U19_573H.12@1199.155,631.373 ; U19_573H.12@1199.032,630.701 1199.032,633.476 U9.7@1200.988,635.432 ; 1199.471,633.914 cw(c1200.988,632.397) U9.7@1200.988,634.543 ; 1199.904,634.348 cw(c1200.988,633.264) U9.7@1200.988,634.797 ; 1200.084,634.527 ccw(c1199.433,635.178) U9.7@1200.353,635.178
DB9: U9.6 U19_573H.13 | length 5.7
  Top Layer w0.254: U19_573H.13@1197.64,631.373 ccw(c1197.406,631.607) 1197.737,631.607 ; 1197.737,631.73 ccw(c1198.241,631.73) U19_573H.13@1197.885,631.373 ; U19_573H.13@1197.762,630.701 1197.737,630.726 1197.737,633.857 1198.448,634.568 U9.6@1198.448,635.432
DB10: U9.5 U19_573H.14 | length 5.6
  Top Layer w0.254: U9.5@1195.908,635.432 1195.908,634.517 1196.492,633.933 U19_573H.14@1196.492,630.701 ; U19_573H.14@1196.37,631.373 ccw(c1196.075,631.669) 1196.492,631.669 ccw(c1196.91,631.669) U19_573H.14@1196.615,631.373
DB11: U9.4 U19_573H.15 | length 10.1
  Top Layer w0.254: U9.4@1193.368,634.543 cw(c1193.368,633.132) 1194.365,634.13 ; U9.4@1193.368,634.797 cw(c1193.368,634) 1193.932,634.563 ; U9.4@1193.368,635.432 1193.368,635.127 1195.07,633.425 1195.07,630.853 U19_573H.15@1195.222,630.701 ; U9.4@1193.749,635.178 ccw(c1194.792,635.178) 1194.055,634.441 ; U9.4@1194.003,635.178 ccw(c1195.659,635.178) 1194.488,634.007 ; 1195.07,632.037 ccw(c1196.008,632.037) U19_573H.15@1195.345,631.373
DGND: C13.2 C14.2 C39.1 C63.1 J20_3.1 U9.3 U19_573H.1 U19_573H.10 U20_573L.1 U20_573L.10 | length 159.3
  Top Layer w0.254: 1182.346,625.754 ccw(c1182.346,627.328) C63.1@1183.459,626.215 ; 1182.837,625.754 cw(c1182.837,624.875) C63.1@1183.459,625.497 ; 1182.959,625.754 ccw(c1182.959,626.714) C63.1@1183.638,626.036 ; C63.1@1183.818,625.348 cw(c1183.818,624.367) 1184.512,625.061 ; C63.1@1183.818,625.983 C63.1@1183.818,625.754 ; C63.1@1184.072,625.856 ccw(c1184.93,625.856) C63.1@1184.323,625.249 ; C63.1@1184.326,625.856 ccw(c1185.798,625.856) 1184.757,624.815 ; U19_573H.1@1188.75,623.429 ccw(c1188.455,623.133) 1188.455,623.551 ccw(c1188.455,623.969) U19_573H.1@1188.75,623.673 ; U19_573H.1@1188.75,624.223 ccw(c1188.087,624.887) 1189.025,624.887 ; U19_573H.1@1188.872,623.551 1186.021,623.551 C63.1@1183.818,625.754 ; U19_573H.1@1189.025,623.722 1189.025,625.17 1189.152,625.297 C39.1@1224.28,625.297 ; 1189.511,633.53 ccw(c1187.863,635.178) U9.3@1190.193,635.178 ; 1189.585,637.767 cw(c1187.504,635.686) U9.3@1190.447,635.686 ; J20_3.1@1189.863,676.326 J20_3.1@1189.863,676.58 ; 1189.944,633.964 ccw(c1188.73,635.178) U9.3@1190.447,635.178 ; 1190.019,637.333 cw(c1188.371,635.686) U9.3@1190.701,635.686 ; v1(1190.041,649.351) 1189.482,648.792 1189.482,637.87 1190.828,636.524 1190.828,634.848 1187.374,631.393 1183.31,631.393 1181.329,629.412 1181.329,626.262 1181.837,625.754 C63.1@1183.818,625.754 ; 1190.308,634.327 cw(c1190.828,633.807) U9.3@1190.828,634.543 ; 1190.378,634.397 ccw(c1189.597,635.178) U9.3@1190.701,635.178 ; 1190.452,636.9 cw(c1189.238,635.686) U9.3@1190.955,635.686 ; 1190.886,636.466 cw(c1190.105,635.686) U9.3@1191.209,635.686 ; C13.2@1199.486,647.043 ccw(c1198.619,647.91) 1199.845,647.91 ccw(c1201.072,647.91) C13.2@1200.204,647.043 ; C14.2@1199.486,649.043 cw(c1198.619,648.175) 1199.845,648.175 cw(c1201.072,648.175) C14.2@1200.204,649.043 ; C13.2@1199.845,646.684 C14.2@1199.845,649.402 ; C14.2@1199.845,649.122 cw(c1200.074,649.122) C14.2@1199.912,649.284 ; 1200.15,625.297 1200.328,625.119 U19_573H.10@1200.328,623.875 ; U19_573H.10@1200.18,624.223 ccw(c1199.823,624.58) 1200.328,624.58 ; 1200.328,624.457 ccw(c1200.659,624.457) U19_573H.10@1200.425,624.223 ; U20_573L.1@1210.34,624.122 ccw(c1210.045,624.417) 1210.462,624.417 ccw(c1210.88,624.417) U20_573L.1@1210.585,624.122 ; U20_573L.1@1210.462,623.449 1210.462,625.17 1210.589,625.297 ; U20_573L.10@1221.892,623.449 1223.067,623.449 1224.28,624.662 ; 1221.95,625.297 ccw(c1221.95,628.085) C39.1@1223.921,626.114 ; U20_573L.10@1222.015,623.327 cw(c1222.31,623.032) 1222.31,623.449 cw(c1222.31,623.867) U20_573L.10@1222.015,623.572 ; 1222.563,625.297 ccw(c1222.563,627.471) C39.1@1224.1,625.934 ; 1223.176,625.297 ccw(c1223.176,626.858) C39.1@1224.28,625.754 ; C39.1@1223.789,625.297 ccw(c1223.789,626.245) C39.1@1224.46,625.575 ; C39.1@1223.874,625.297 C39.1@1224.28,625.704 ; C39.1@1223.953,625.366 cw(c1223.36,624.662) 1224.28,624.662 ; C39.1@1224.28,625.881 1224.28,624.662 ; C39.1@1224.607,625.366 ccw(c1225.2,624.662) 1224.28,624.662
  Bottom Layer w0.254: J20_3.1@1189.092,676.241 cw(c1188.029,675.177) 1189.533,675.177 cw(c1191.037,675.177) J20_3.1@1189.973,676.241 ; J20_3.1@1189.272,676.42 cw(c1188.642,675.791) 1189.533,675.791 cw(c1190.424,675.791) J20_3.1@1189.794,676.42 ; J20_3.1@1189.533,676.681 1189.533,649.884 1190.117,649.3 v1(1199.896,649.3) ; v1@1190.039,649.35 ccw(c1190.159,649.469) v1@1190.159,649.3
  other v1: 1199.464,649.3
GND: C1.1 C2.1 C3.1 C4.1 C5.1 C6.1 C7.1 C8.1 C9.1 C10.1 C11.1 C12.1 C18.2 C19.2 C20.2 C21.2 C22.2 C35.1 C36.1 C42.2 C43.2 C44.2 D3.1 J0.2 JP10.3 JTAG.4 JTAG.6 JTAG.8 JTAG.10 JTAG.12 JTAG.14 JTAG.16 JTAG.18 JTAG.20 MCU.16 MCU.30 MCU.38 MCU.51 MCU.61 MCU.71 MCU.83 MCU.94 MCU.107 MCU.120 MCU.130 MCU.138 MCU.143 R5.1 R28.1 U117_3.3.1 U_5v.1